# Altium PCB hw_tutorial.PcbDoc
Units mm, origin at the board's own origin, x right, y up, seen from the top; angles counter-clockwise.
Board outline 50 x 50 mm, 2 copper layers (Top Layer, Bottom Layer); 35 components, 24 nets, 146 pads, 47 vias.
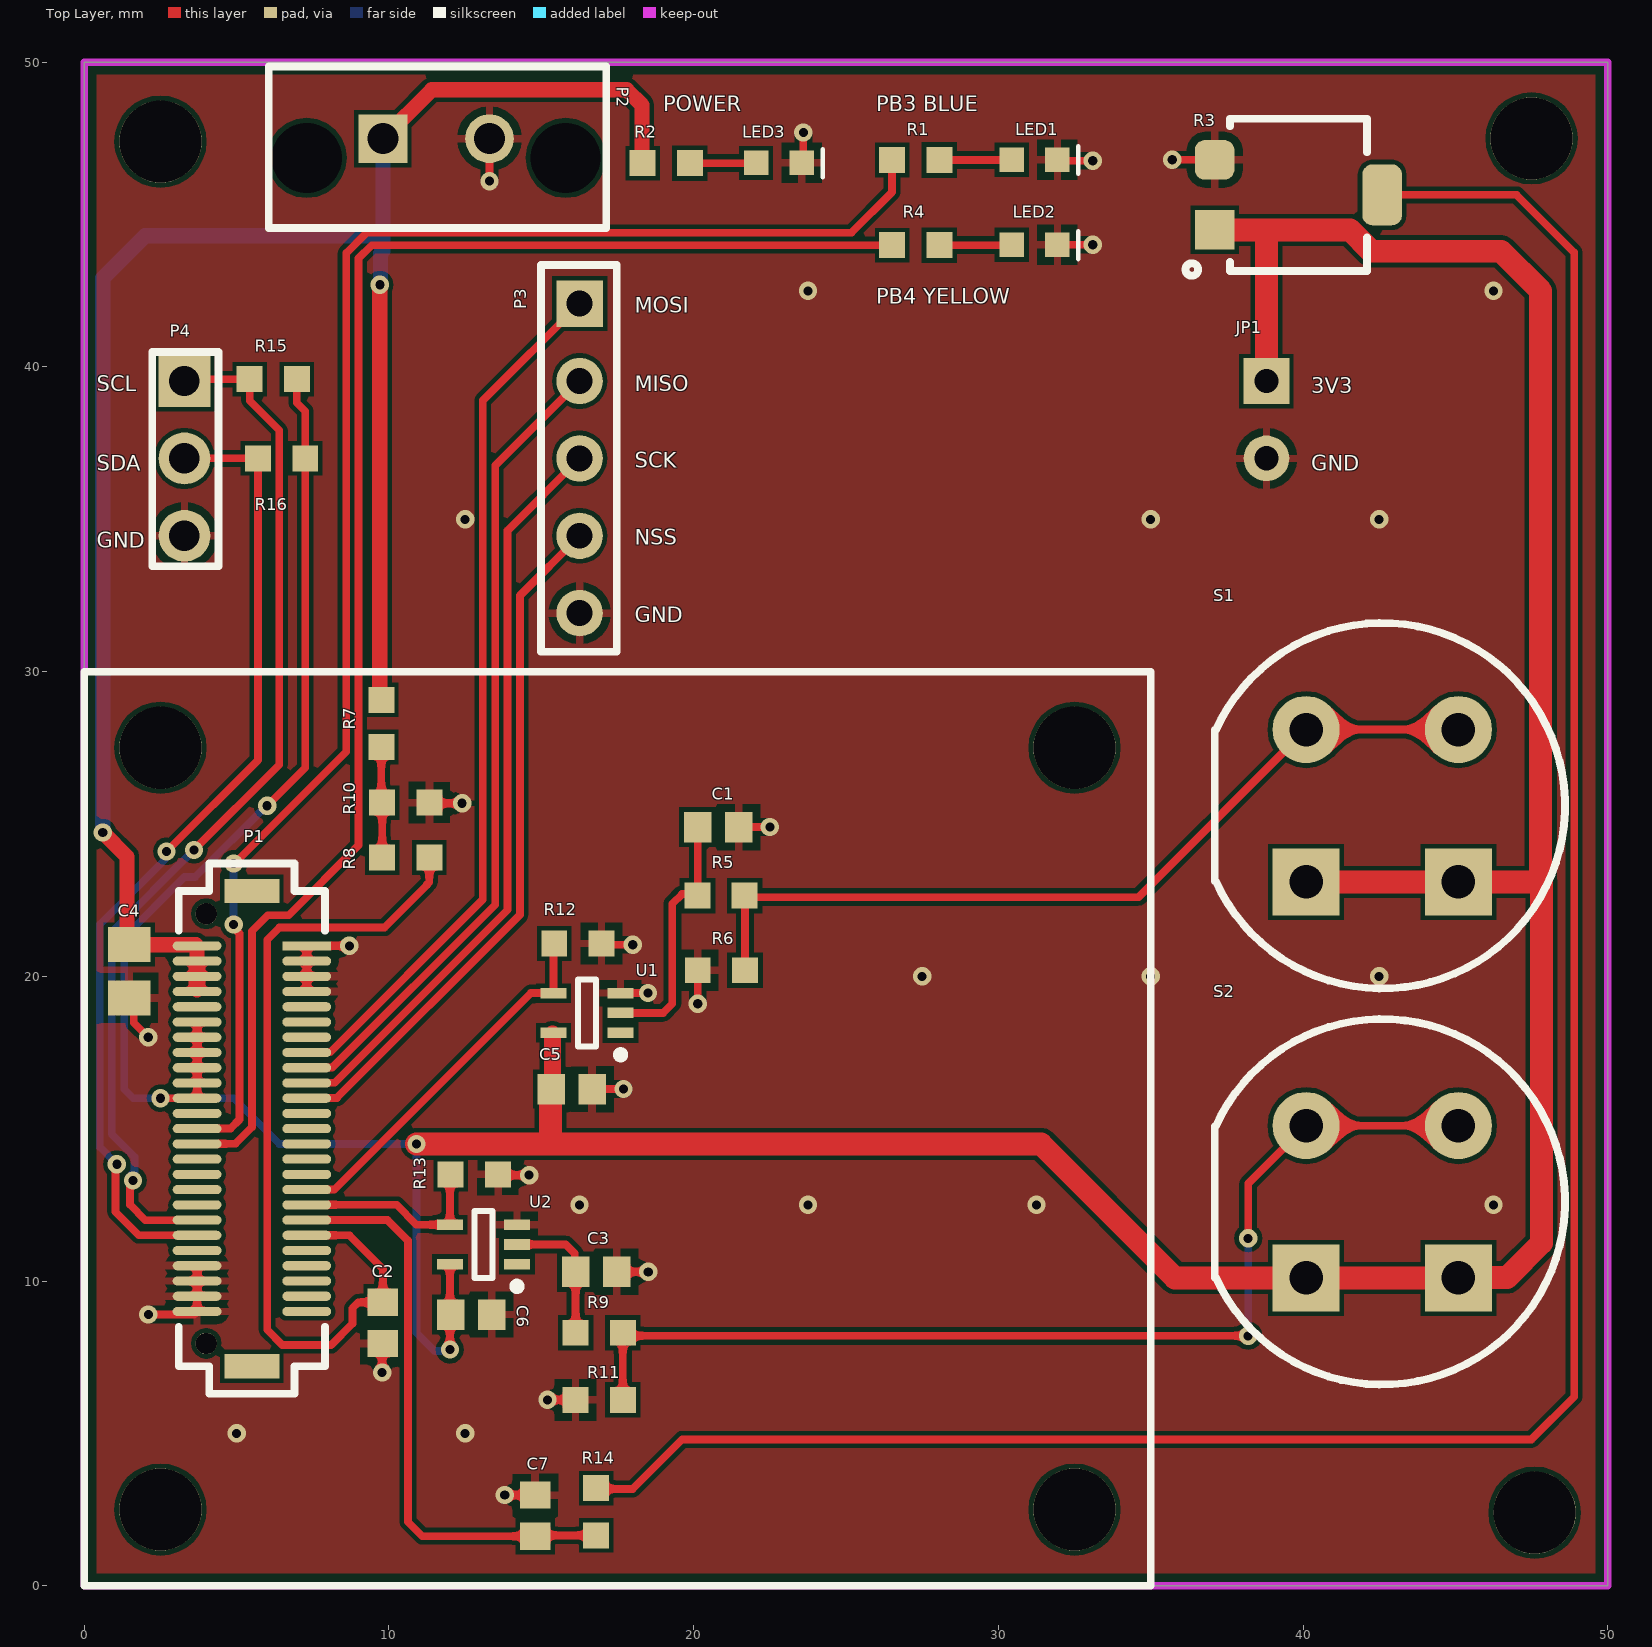
[diagram p0: Top Layer view]
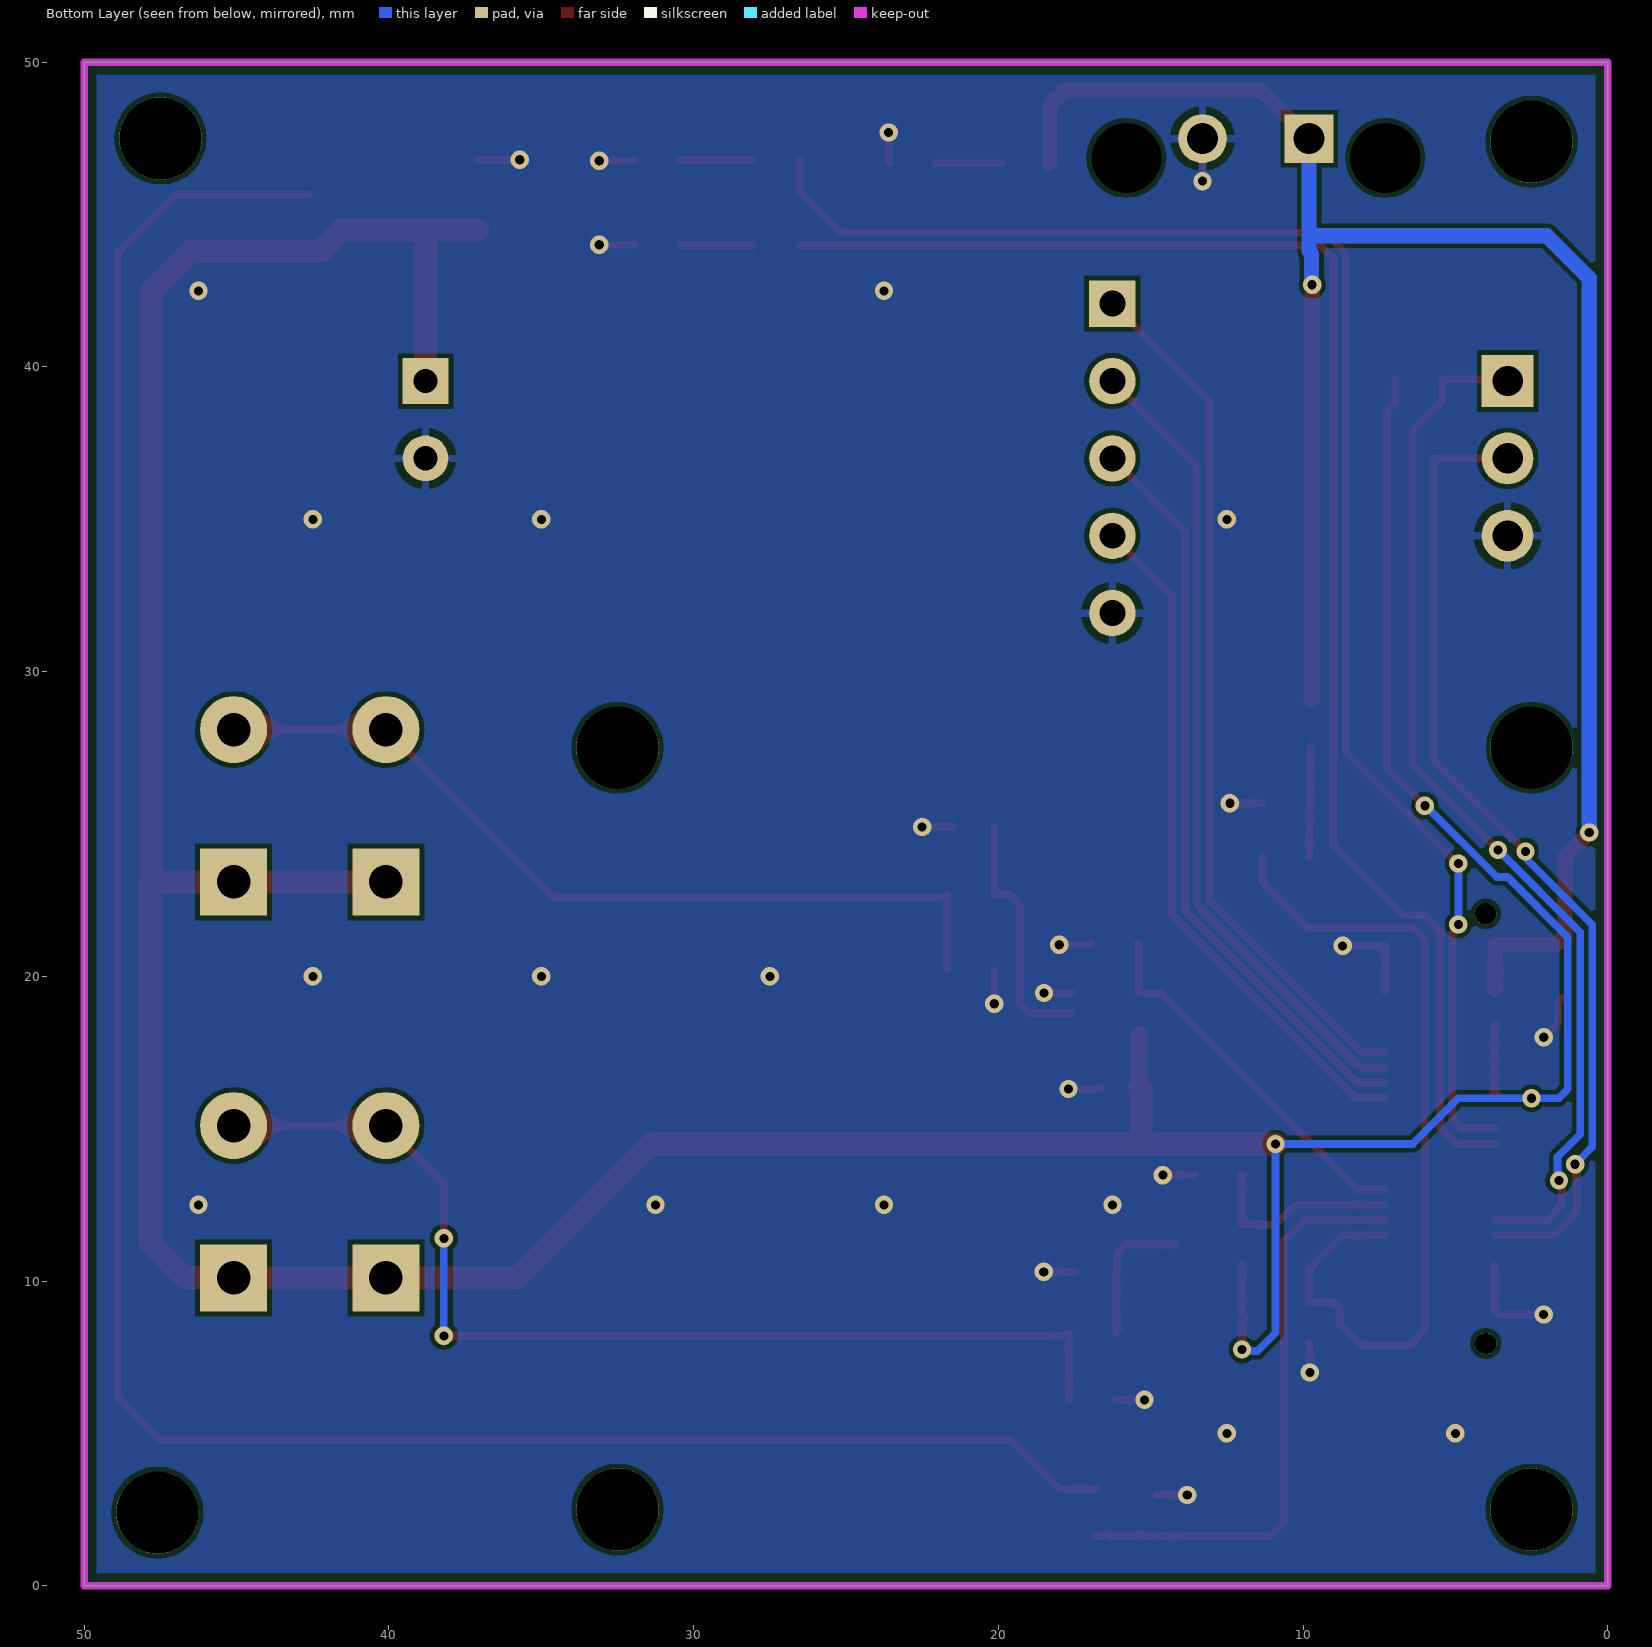
[diagram p1: Bottom Layer view, seen from below]
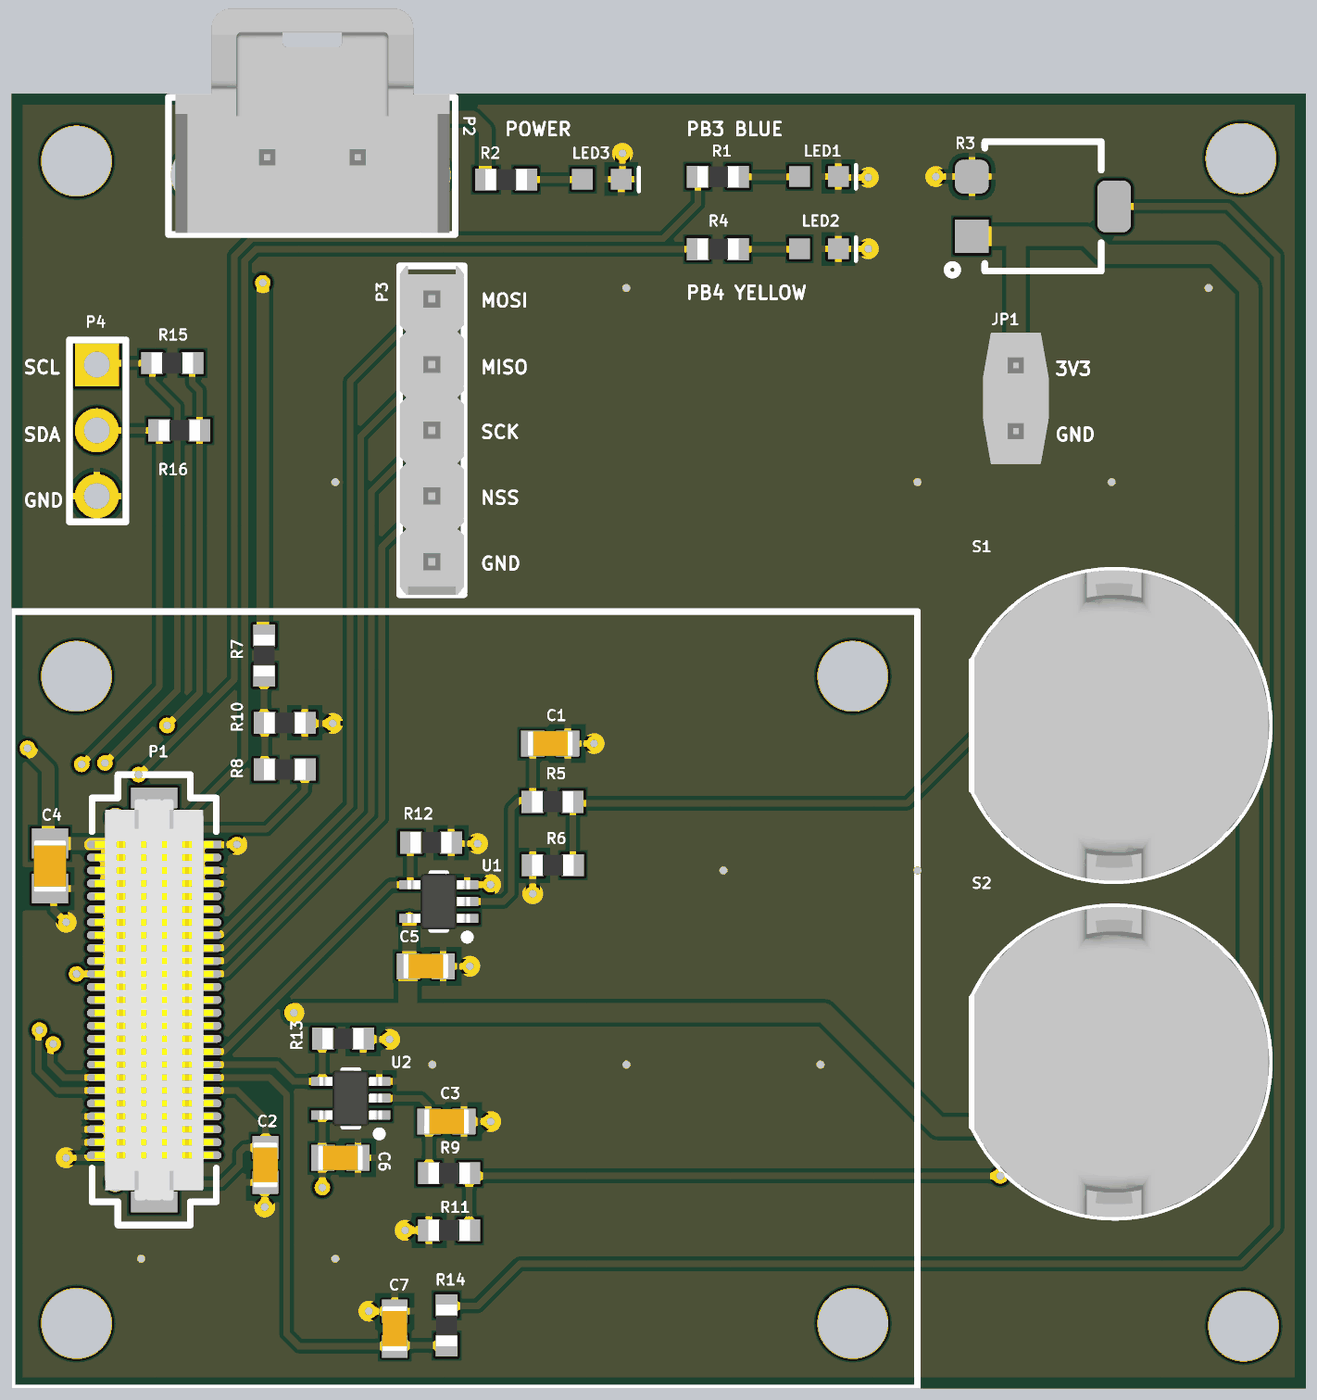
[diagram p2: 3D render of the assembled board from above, using the file's embedded part models]

## Layer stack, top to bottom
Top Solder: solder mask 0.0102, Solder Resist, Dk 3.5
Top Layer: signal copper 0.0356
Dielectric 1: dielectric 0.32, FR-4, Dk 4.8
Bottom Layer: signal copper 0.0356
Bottom Solder: solder mask 0.0102, Solder Resist, Dk 3.5

## Board outline
0,0 0,50 50,50 50,0

## Design rules (kind name [scope] priority, off if disabled: settings)
BoardOutlineClearance [All] p1: gap=0.406 ignorepadtopadclearanceinfootprint=FALSE
Clearance [All] p1: gap=0.152 ignorepadtopadclearanceinfootprint=FALSE except(0: Arc-Hole Track-Hole SMDPad-Hole THPad-Hole Via-Hole Fill-Hole Poly-Hole Region-Hole Text-Hole)
ComponentClearance ComponentClearance_ControllerBoard [InComponent('P1') vs Identifier = 'Controller_Board'] p1: gap=0 collisioncheckmode=3 verticalgap=0 showdistances=FALSE
ComponentClearance ComponentClearance_Standoffs [Identifier = 'Standoff' vs Identifier = 'Controller_Board'] p2: gap=0 collisioncheckmode=3 verticalgap=0 showdistances=FALSE
ComponentClearance [All] p3: gap=0.254 collisioncheckmode=3 verticalgap=0.254 showdistances=FALSE
HoleSize [All] p1: absolutevalues=TRUE maxlimit=6.3 minlimit=0.3 maxpercent=80.000 minpercent=20.000
MinimumAnnularRing [All] p1: minimumring=0.152
MinimumSolderMaskSliver [All] p1: minsoldermaskwidth=0.3
PolygonConnect [IsPad] p1: connectstyle=Relief reliefconductorwidth=0.254 reliefentries=4 polygonreliefangle="90 Angle" airgapwidth=0.254
PolygonConnect PolygonConnect_NoThermal [Not(IsPad)] p2: connectstyle=Direct reliefconductorwidth=0.254 reliefentries=4 polygonreliefangle="90 Angle" airgapwidth=0.254
RoutingVias [All] p1: holewidth=0.3 width=0.6 viastyle="Through Hole" minholewidth=0.3 minwidth=0.6 maxholewidth=0.711 maxwidth=1.27
SilkToSolderMaskClearance [IsPad] p1: minsilkscreentomaskgap=0.178 clearancetoexposedcopper=TRUE
SolderMaskExpansion [All] p1: expansion=0.102
Width [All] p1: maxlimit=2.54 minlimit=0.152 preferedwidth=0.254
26 further rules are at their usual default settings.

## Components (designator, comment, footprint, x,y, rotation, side; value= is the part's Value field where it differs from the comment)
C1 "CAP CER 4.7UF 25V 10% X5R 0603" "CAP, 0603" 20.808,24.9 r0 top
C2 "CAP CER 0.1UF 50V 10% X7R 0603" "CAP, 0603" 9.8,8.625 r270 top
C3 "CAP CER 4.7UF 25V 10% X5R 0603" "CAP, 0603" 16.8,10.3 r0 top
C4 "CAP CER 10uF 25V 10% X5R 0805" "CAP, 0805" 1.476,20.17 r270 top
C5 "CAP CER 0.1UF 50V 10% X7R 0603" "CAP, 0603" 16,16.3 r0 top
C6 "CAP CER 0.1UF 50V 10% X7R 0603" "CAP, 0603" 12.7,8.9 r0 top
C7 "CAP CER 4.7UF 25V 10% X5R 0603" "CAP, 0603" 14.8,2.3 r90 top
JP1 "JUMPER" "CONN, 2POS JUMPER 0.1\"" 38.8,39.54 r270 top
LED1 "LED GREEN CLEAR 2V 0603" LED_0603 30.489,46.795 r0 top
LED2 "LED YELLOW CLEAR 2.1V 0603" LED_0603 30.489,44.002 r0 top
LED3 "LED BLUE CLEAR 2.8V 0603" LED_0603 22.1,46.69 r0 top
P1 "CONN 50POS Bergstak Plug 0.02\"" "CONN, BERGSTAK 50 POS PLUG" 5.5,15 r0 top locked
P2 "CONN 2POS ULTRA-FIT 0.138\"" "CONN, 2POS ULTRA-FIT" 9.8,47.495 r0 top locked
P3 "5POS 0.1" "CONN, 5POS HEADR 0.1\"" 16.258,42.08 r270 top
P4 "CONN 3POS HEADR MALE 0.1\"" "CONN, 3POS 0.100\" Header, 1 ROW" 3.286,39.54 r270 top
R1 "RES 100 OHM 1% 1/10W 0603" "RES, 0603" 27.289,46.795 r0 top
R2 "RES 10K OHM 1% 1/10W 0603" "RES, 0603" 19.1,46.69 r0 top
R3 "POT 20k OHM 20% 1/4W" "20K POT" 42.6,45.65 r180 top value=20K
R4 "RES 100 OHM 1% 1/10W 0603" "RES, 0603" 27.289,44 r0 top
R5 "1K" "RES, 0603" 20.9,22.65 r180 top
R6 "1K" "RES, 0603" 20.908,20.2 r0 top
R7 "RES 10K OHM 1% 1/10W 0603" "RES, 0603" 9.75,28.3 r270 top
R8 "RES 10K OHM 1% 1/10W 0603" "RES, 0603" 10.55,23.9 r0 top
R9 "1K" "RES, 0603" 16.9,8.3 r180 top
R10 "RES 3.3K OHM 1% 1/4W 0603" "RES, 0603" 10.55,25.7 r0 top
R11 "1K" "RES, 0603" 16.9,6.1 r0 top
R12 "1K" "RES, 0603" 16.2,21.075 r180 top
R13 "1K" "RES, 0603" 12.8,13.5 r180 top
R14 "1K" "RES, 0603" 16.8,2.425 r90 top
R15 "RES 10K OHM 1% 1/10W 0603" "RES, 0603" 6.2,39.6 r180 top
R16 "RES 10K OHM 1% 1/10W 0603" "RES, 0603" 6.475,37 r180 top
S1 "SPST" "SW SPST D6 SERIES GREEN" 40.1,23.1 r0 top
S2 "SPST" "SW SPST D6 SERIES YELLOW" 40.1,10.1 r0 top
U1 "IC INVERTER SCHMITT 1CH SC70-5" "IC INVERTER SCHMITT 1CH SC70-5" 16.5,18.8 r180 top
U2 "IC INVERTER SCHMITT 1CH SC70-5" "IC INVERTER SCHMITT 1CH SC70-5" 13.1,11.2 r180 top

## Footprints (in the part's own frame and the unit in brackets; to place one, negate y for a bottom-side part, rotate by r counter-clockwise, add the part's x,y. Pads: shape width x height; smd on the part's side, far side on the other; paste and mask are expansions set on the pad)
"20K POT" [mm]
  rect 1.3x1.3 smd: 1(5.5,1.15)
  rrect50% 1.3x2 smd: 2(0,0)
  rrect50% 1.3x1.3 smd: 3(5.5,-1.15)
  silkscreen extent 0.5,-2.5 6.46,2.66
"CAP, 0603" [mm] "Chip Capacitor, 2-Leads, Body 1.60x0.81mm, IPC Medium Density"
  rect 0.9x1 smd mask+0.076: 1(-0.675,0) 2(0.675,0)
  body extent -0.87,-0.48 0.87,0.48, height 0.9
"CAP, 0805" [mm] "Chip Capacitor, 2-Leads, Body 2.00x1.25mm, IPC Medium Density"
  rect 1.15x1.4 smd: 1(-0.875,0) 2(0.875,0)
  body extent -1,-0.63 1,0.63, height 1.25
"CONN, 2POS JUMPER 0.1\"" [mm]
  rect 1.5x1.5 hole 0.8: 1(0,0)
  round 1.5 hole 0.8: 2(2.54,0)
  body extent -1.24,-1.27 3.84,1.27, height 9.25
"CONN, 2POS ULTRA-FIT" [mm] "2 Positions Header, Shrouded Connector 0.138\" (3.50mm) Through Hole Gold"
  rect 1.6x1.6 hole 1.02: 1(0,0)
  round 1.6 hole 1.02: 2(3.5,0)
  round 1.6 hole 2.3: ""(-2.5,-0.63) ""(6,-0.63)
  silkscreen extent -3.74,-2.93 7.33,2.37, body extent -3.48,-2.87 7.12,5.79, height 13.85
"CONN, 3POS 0.100\" Header, 1 ROW" [mm] "Connector, 3 position 0.1\" (2.54mm) Through Hole Generic Header"
  rect 1.7x1.7 hole 1: 1(0,0)
  round 1.7 hole 1: 2(2.54,0) 3(5.08,0)
  silkscreen extent -0.95,-1.06 6.08,1.12
"CONN, 5POS HEADR 0.1\"" [mil]
  rect 60x60 hole 33.46: 1(0,0)
  round 60 hole 33.46: 2(100,0) 3(200,0) 4(300,0) 5(400,0)
  silkscreen extent -50,-50 450,48, body extent -50,-50 450,48, height 335
"CONN, BERGSTAK 50 POS PLUG" [mm] "Bergstak 50 Position Plug"
  rect 1.6x0.3 smd: 1(1.8,6)
  oval 1.6x0.3 smd: 2(1.8,5.5) 3(1.8,5) 4(1.8,4.5) 5(1.8,4) 6(1.8,3.5) 7(1.8,3) 8(1.8,2.5) 9(1.8,2) 10(1.8,1.5) 11(1.8,1) 12(1.8,0.5) 13(1.8,0) 14(1.8,-0.5) 15(1.8,-1) 16(1.8,-1.5) 17(1.8,-2) 18(1.8,-2.5) 19(1.8,-3) 20(1.8,-3.5) 21(1.8,-4) 22(1.8,-4.5) 23(1.8,-5) 24(1.8,-5.5) 25(1.8,-6) 26(-1.8,-6) 27(-1.8,-5.5) 28(-1.8,-5) 29(-1.8,-4.5) 30(-1.8,-4) 31(-1.8,-3.5) 32(-1.8,-3) 33(-1.8,-2.5) 34(-1.8,-2) 35(-1.8,-1.5) 36(-1.8,-1) 37(-1.8,-0.5) 38(-1.8,0) 39(-1.8,0.5) 40(-1.8,1) 41(-1.8,1.5) 42(-1.8,2) 43(-1.8,2.5) 44(-1.8,3) 45(-1.8,3.5) 46(-1.8,4) 47(-1.8,4.5) 48(-1.8,5) 49(-1.8,5.5) 50(-1.8,6)
  round 0.7 hole 0.7: ""(-1.5,-7.05) ""(-1.5,7.05)
  rect 1.8x0.8 smd: ""(0,-7.8) ""(0,7.8)
  silkscreen extent -2.4,-8.7 2.4,8.7, body extent -2.3,-7.75 2.3,7.75, height 4.2
"IC INVERTER SCHMITT 1CH SC70-5" [mm] "Inverter IC 1 Channel Schmitt Trigger SC-70-5"
  rect 0.85x0.35 smd: 1(-1.1,0.65) 2(-1.1,0) 3(-1.1,-0.65) 4(1.1,-0.65) 5(1.1,0.65)
  silkscreen extent -1.23,-1.1 0.3,1.5, body extent -1.2,-1.07 1.2,1.07, height 1.1
LED_0603 [mm]
  rect 0.8x0.8 smd: 1(-0.05,0.01) 2(1.45,0.01)
  silkscreen extent 2.13,-0.46 2.13,0.45, body extent -0.09,-0.39 1.51,0.41, height 0.8
"RES, 0603" [mm] "Chip Resistor, 2-Leads, Body 1.60x0.80mm, IPC Medium Density"
  rect 0.85x0.85 smd: 1(-0.775,0) 2(0.775,0)
  body extent -0.8,-0.4 0.8,0.4, height 0.55
"SW SPST D6 SERIES GREEN" [mm]
  rect 2.2x2.2 hole 1.1: 1(0,0) 1(5,0)
  round 2.2 hole 1.1: 2(0,5) 2(5,5)
  silkscreen extent -3,-3.5 8.5,8.5, body extent -2.9,-3.5 8.5,8.5, height 6.17
"SW SPST D6 SERIES YELLOW" [mm]
  rect 2.2x2.2 hole 1.1: 1(0,0) 1(5,0)
  round 2.2 hole 1.1: 2(0,5) 2(5,5)
  silkscreen extent -3,-3.5 8.5,8.5, body extent -2.9,-3.5 8.5,8.5, height 6.17

## Part data
C1 C3 C7: "4.7µF ±10% 25V Ceramic Capacitor X5R 0603 (1608 Metric)", Capacitance=4.7µF, Manufacturer 1="Murata Electronics North America", Manufacturer Part Number 1=GRM188R61E475KE11D, Operating Temperature="-55°C ~ 85°C", Package / Case="0603 (1608 Metric)", Ratings=-, Supplier Part Number 1=490-7203-1-ND, Temperature Coefficient=X5R, Tolerance=±10%, Voltage=25V, ComponentLink1Description=http://www.murata.com/~/media/webrenewal/support/library/catalog/products/capacitor/mlcc/c02e.ashx, ComponentLink1URL=http://www.murata.com/~/media/webrenewal/support/library/catalog/products/capacitor/mlcc/c02e.ashx, Height - Seated (Max)=-, Lead Spacing=-, Lead Style=-, Mounting Type="Surface Mount, MLCC", Packaging="Cut Tape (CT)", Part Status=Active, Size / Dimension="0.063\" L x 0.031\" W (1.60mm x 0.80mm)", Supplier 1=Digi-Key, Thickness (Max)="0.031\" (0.80mm)"
C2 C5 C6: "0.10µF ±10% 50V Ceramic Capacitor X7R 0603 (1608 Metric)", Capacitance=0.1µF, Manufacturer 1="AVX Corporation", Manufacturer Part Number 1=06035C104KAT2A, Operating Temperature="-55°C ~ 125°C", Package / Case="0603 (1608 Metric)", Ratings=-, Supplier Part Number 1=478-5052-1-ND, Temperature Coefficient=X7R, Tolerance=±10%, Voltage=50V, ComponentLink1Description=http://datasheets.avx.com/X7RDielectric.pdf, ComponentLink1URL=http://datasheets.avx.com/X7RDielectric.pdf, Height - Seated (Max)=-, Lead Spacing=-, Lead Style=-, Mounting Type="Surface Mount, MLCC", Packaging="Cut Tape (CT)", Part Status=Active, Size / Dimension="0.063\" L x 0.032\" W (1.60mm x 0.81mm)", Supplier 1=Digi-Key, Thickness (Max)="0.035\" (0.90mm)"
C4: "10µF ±10% 25V Ceramic Capacitor X5R 0805 (2012 Metric)", Capacitance=10µF, Manufacturer="Murata Electronics North America", Manufacturer Part Number=GRM21BR61E106KA73L, Operating Temperature="-55°C ~ 85°C", Package / Case="0805 (2012 Metric)", Ratings=-, Supplier Part Number 1=490-5523-1-ND, Temperature Coefficient=X5R, Tolerance=±10%, Voltage - Rated=25V, Applications="General Purpose", Category=Capacitors, ComponentLink1Description=http://search.murata.co.jp/Ceramy/image/img/A01X/G101/ENG/GRM21BR61E106KA73-01.pdf, ComponentLink1URL=http://search.murata.co.jp/Ceramy/image/img/A01X/G101/ENG/GRM21BR61E106KA73-01.pdf, Features=-, Height - Seated (Max)=-, Lead Spacing=-, Lead Style=-, Mounting Type="Surface Mount, MLCC", Packaging="Cut Tape (CT)", Part Status=Active, Pricing 1="1=0.3, 10=0.214, 100=0.1008, 500=0.07068, 1000=0.05851 (CAD)", RoHS="RoHS Compliant", Size / Dimension="0.079\" L x 0.049\" W (2.00mm x 1.25mm)", Stock 1=1695157, Supplier 1=Digi-Key, Thickness (Max)="0.053\" (1.35mm)"
JP1: library part "CONN 2POS JUMPER 0.1\"", "2 Positions Header Connector Through Hole Gold", Current Rating=2A, Insulation Color=Black, Manufacturer="Omron Electronics Inc-EMC Div", Manufacturer Part Number=XG8T-0231, Material Flammability Rating="UL94 V-0", Operating Temperature="-55°C ~ 105°C", Supplier Part Number 1=XG8T-0231-ND, Voltage Rating=300V, Applications=-, Category="Connectors, Interconnects", ComponentLink1Description=http://www.omron.com/ecb/products/pdf/en-xj8.pdf, ComponentLink1URL=http://www.omron.com/ecb/products/pdf/en-xj8.pdf, Connector Type=Header, Contact Finish - Mating=Gold, Contact Finish - Post=Tin, Contact Finish Thickness - Mating="5.9µin (0.15µm)", Contact Finish Thickness - Post=-, Contact Length - Mating="0.169\" (4.30mm)", Contact Length - Post="0.118\" (3.00mm)", Contact Material="Brass, Nickel", Contact Shape=Square, Contact Type="Male Pin", Fastening Type=-, Features=-, Ingress Protection=-, Insulation Height="0.098\" (2.50mm)", Insulation Material="Polybutylene Terephthalate (PBT), Glass Filled", Mated Stacking Heights=-, Mounting Type="Through Hole", Number of Positions=2, Number of Positions Loaded=All, Number of Rows=2, Overall Contact Length="0.386\" (9.80mm)", Packaging=Bulk, Part Status=Active, Pitch - Mating=-, Pricing 1="1=0.28, 10=0.265, 100=0.183, 500=0.15484, 1000=0.12668, 5000=0.11261, 10000=0.10205 (CAD)", RoHS="RoHS Compliant", Row Spacing - Mating="0.100\"", Shrouding=Unshrouded, Stock 1=9094, Style="Board to Board or Cable", Supplier 1=Digi-Key, Termination=Solder, Type=JUMPER
LED1: "Green 572nm LED Indication - Discrete 2V 0603 (1608 Metric)", Color=Green, Current - Test=20mA, Lens Color=Colorless, Manufacturer="Wurth Electronics Inc.", Manufacturer Part Number=150060VS75000, Millicandela Rating=40mcd, Package / Case="0603 (1608 Metric)", Supplier Device Package=0603, Supplier Part Number 1=732-4980-1-ND, Voltage - Forward (Vf) (Typ)=2V, Category=Optoelectronics, ComponentLink1Description=http://katalog.we-online.de/led/datasheet/150060VS75000.pdf, ComponentLink1URL=http://katalog.we-online.de/led/datasheet/150060VS75000.pdf, Features=-, Height (Max)=0.80mm, Lens Style/Size="Rectangle with Flat Top, 1.10mm x 0.70mm", Lens Transparency=Clear, Mounting Type="Surface Mount", Packaging="Cut Tape (CT)", Part Status=Active, Pricing 1="1=0.21, 100=0.1617, 500=0.13964 (CAD)", RoHS="RoHS Compliant", Size / Dimension="1.60mm L x 0.80mm W", Stock 1=9408, Supplier 1=Digi-Key, Viewing Angle=140°, Wavelength - Dominant=570nm, Wavelength - Peak=572nm
LED2: "Yellow 590nm LED Indication - Discrete 2V 0603 (1608 Metric)", Color=Yellow, Current - Test=20mA, Lens Color=Colorless, Manufacturer="Wurth Electronics Inc.", Manufacturer Part Number=150060YS75000, Millicandela Rating=120mcd, Package / Case="0603 (1608 Metric)", Supplier Device Package=0603, Supplier Part Number 1=732-4981-1-ND, Voltage - Forward (Vf) (Typ)=2V, Category=Optoelectronics, ComponentLink1Description=http://katalog.we-online.de/led/datasheet/150060YS75000.pdf, ComponentLink1URL=http://katalog.we-online.de/led/datasheet/150060YS75000.pdf, Features=-, Height (Max)=0.80mm, Lens Style/Size="Rectangle with Flat Top, 1.10mm x 0.70mm", Lens Transparency=Clear, Mounting Type="Surface Mount", Packaging="Cut Tape (CT)", Part Status=Active, Pricing 1="1=0.21, 100=0.1617, 500=0.13964 (CAD)", RoHS="RoHS Compliant", Size / Dimension="1.60mm L x 0.80mm W", Stock 1=10523, Supplier 1=Digi-Key, Viewing Angle=140°, Wavelength - Dominant=590nm, Wavelength - Peak=595nm
LED3: "Blue 470nm LED Indication - Discrete 2.8V 0603 (1608 Metric)", Color=Blue, Current - Test=5mA, Lens Color=Colorless, Manufacturer 1="Lite-On Inc.", Manufacturer Part Number 1=LTST-C193TBKT-5A, Millicandela Rating=15mcd, Package / Case="0603 (1608 Metric)", Supplier Device Package="Chip LED", Supplier Part Number 1=160-1827-1-ND, Voltage - Forward (Vf) (Typ)=2.8V, ComponentLink1Description=http://optoelectronics.liteon.com/upload/download/DS22-2004-060/P_100_LTST-C193TBKT-5A.pdf, ComponentLink1URL=http://optoelectronics.liteon.com/upload/download/DS22-2004-060/P_100_LTST-C193TBKT-5A.pdf, Height (Max)=0.45mm, Lens Style/Size="Rectangle with Flat Top, 1.15mm x 0.80mm", Lens Transparency=Clear, Mounting Type="Surface Mount", Packaging="Cut Tape (CT)", Part Status=Active, Size / Dimension="1.60mm L x 0.80mm W", Supplier 1=Digi-Key, Viewing Angle=130°, Wavelength - Dominant=470nm, Wavelength - Peak=468nm
P1: "50 Position Connector Plug, Outer Shroud Contacts Surface Mount Gold", Manufacturer 1="Amphenol FCI", Manufacturer Part Number 1=10132797-055100LF, Supplier Part Number 1=609-5226-1-ND, ComponentLink1Description=http://portal.fciconnect.com/Comergent//fci/drawing/10132797.pdf, ComponentLink1URL=http://portal.fciconnect.com/Comergent//fci/drawing/10132797.pdf, Connector Type="Plug, Outer Shroud Contacts", Contact Finish=Gold, Contact Finish Thickness="1µin (0.025µm)", Height Above Board="0.169\" (4.30mm)", Mated Stacking Heights=5mm, Mounting Type="Surface Mount", Number of Positions=50, Number of Rows=2, Packaging="Cut Tape (CT)", Part Status=Active, Pitch="0.020\" (0.50mm)", Series="BergStak Plug", Supplier 1=Digi-Key
P2: "2 Positions Header, Shrouded Connector 0.138\" (3.50mm) Through Hole Gold", Current Rating=-, Insulation Color=Black, Manufacturer 1="Molex, LLC", Manufacturer Part Number 1=1722861302, Material Flammability Rating="UL94 V-0", Operating Temperature="-40°C ~ 120°C", Supplier Part Number 1=WM11673-ND, Voltage=400V, ComponentLink1Description=http://www.molex.com/pdm_docs/sd/1722861302_sd.pdf, ComponentLink1URL=http://www.molex.com/pdm_docs/sd/1722861302_sd.pdf, Connector Type=Header, Contact Finish - Mating=Gold, Contact Finish - Post=Tin, Contact Finish Thickness - Mating="30µin (0.76µm)", Contact Finish Thickness - Post="60µin (1.52µm)", Contact Length - Mating=-, Contact Length - Post="0.126\" (3.20mm)", Contact Material="Copper Alloy", Contact Shape=Square, Contact Type="Male Pin", Fastening Type="Latch Holder", Ingress Protection=-, Insulation Height="0.465\" (11.80mm)", Insulation Material="Liquid Crystal Polymer (LCP)", Mated Stacking Heights=26.99mm, Mounting Type="Through Hole", Number of Positions=2, Number of Positions Loaded=All, Number of Rows=1, Overall Contact Length=-, Packaging=Tray, Part Status=Active, Pitch - Mating="0.138\" (3.50mm)", Row Spacing - Mating=-, Series=UltraFit, Shrouding="Shrouded - 4 Wall", Style="Board to Board or Cable", Supplier 1=Digi-Key, Termination="Kinked Pin, Solder"
P3: library part "CONN 5POS HEADR MALE 0.1in", "5 Positions Header, Breakaway Connector 0.100\" (2.54mm) Through Hole Tin", Colour=Black, Contact Resistance=20mR, Manufacturer 1=Molex, Manufacturer Part Number 1=0022284050, Max Operating Temperature=75°C, Max Voltage Rating (AC)=250V, Min Operating Temperature=0°C, Supplier Part Number 1=WM50014-05-ND, ComponentLink1Description=https://datasheet.ciiva.com/6814/022284363-sd-6814049.pdf, ComponentLink1URL=https://datasheet.ciiva.com/6814/022284363-sd-6814049.pdf, ComponentLink2Description=https://datasheet.ciiva.com/14804/179390022284050-pcb-headers-14804361.pdf, ComponentLink2URL=https://datasheet.ciiva.com/14804/179390022284050-pcb-headers-14804361.pdf, ComponentLink3Description=https://datasheet.ciiva.com/15217/getdatasheetpartid-256138-15217709.pdf, ComponentLink3URL=https://datasheet.ciiva.com/15217/getdatasheetpartid-256138-15217709.pdf, Connector Type="Male Pin", Contact Material=Bronze,Brass, Contact Mating Length=0.24inch, Contact Plating=Nickel,Tin, Depth=2.49mm, Description 1="Conn Unshrouded Header HDR 5 POS 2.54mm Solder ST Thru-Hole KK® Bag", Gender=Male, Housing Colour=Black, Housing Material=Nylon, Length=12.7mm, Max Voltage Rating (DC)=250V, Mount="Through Hole", Number of Contacts=5, Number of Positions=5, Number of Rows=1, Orientation=Straight, Packaging=Bulk, Pitch=2.54mm, Pricing 1="1=0.22, 10=0.21, 25=0.1796, 50=0.157, 100=0.1459, 250=0.129, 500=0.1234 (USD)", Stock 1=3161, Supplier 1=Digi-Key, Termination=Solder
P4: "3 Positions Header Connector 0.100\" (2.54mm) Through Hole Gold", Current Rating=3A, Insulation Color=Black, Manufacturer 1="Wurth Electronics Inc.", Manufacturer Part Number 1=61300311121, Material Flammability Rating="UL94 V-0", Operating Temperature="-40°C ~ 125°C", Supplier Part Number 1=732-5316-ND, Voltage=250V, ComponentLink1Description=http://katalog.we-online.de/em/datasheet/6130xx11121.pdf, ComponentLink1URL=http://katalog.we-online.de/em/datasheet/6130xx11121.pdf, Connector Type=Header, Contact Finish - Mating=Gold, Contact Finish - Post=-, Contact Finish Thickness - Mating=-, Contact Finish Thickness - Post=-, Contact Length - Mating="0.236\" (6.00mm)", Contact Length - Post="0.118\" (3.00mm)", Contact Material="Copper Alloy", Contact Shape=Square, Contact Type="Male Pin", Fastening Type=-, Ingress Protection=-, Insulation Height="0.100\" (2.54mm)", Insulation Material="Polybutylene Terephthalate (PBT)", Mated Stacking Heights=-, Mounting Type="Through Hole", Number of Positions=3, Number of Positions Loaded=All, Number of Rows=1, Overall Contact Length="0.454\" (11.54mm)", Packaging=Bulk, Part Status=Active, Pitch - Mating="0.100\" (2.54mm)", Row Spacing - Mating=-, Shrouding=Unshrouded, Style="Board to Board or Cable", Supplier 1=Digi-Key, Termination=Solder
R1 R4: "100 Ohm ±1% 0.1W, 1/10W Chip Resistor 0603 (1608 Metric) Moisture Resistant Thick Film", Manufacturer 1=Yageo, Manufacturer Part Number 1=RC0603FR-07100RL, Operating Temperature="-55°C ~ 155°C", Package / Case="0603 (1608 Metric)", Power=1/10W, Resistance=100, Supplier Device Package=0603, Supplier Part Number 1=311-100HRCT-ND, Temperature Coefficient=±100ppm/°C, Tolerance=±1%, ComponentLink1Description=http://www.yageo.com/documents/recent/PYu-RC_Group_51_RoHS_L_7.pdf, ComponentLink1URL=http://www.yageo.com/documents/recent/PYu-RC_Group_51_RoHS_L_7.pdf, Composition="Thick Film", Failure Rate=-, Height - Seated (Max)="0.022\" (0.55mm)", Packaging="Cut Tape (CT)", Part Status=Active, Size / Dimension="0.063\" L x 0.031\" W (1.60mm x 0.80mm)", Supplier 1=Digi-Key
R2 R7 R8 R15 R16: "RES SMD 10K OHM 1% 1/10W 0603", Manufacturer 1=Yageo, Manufacturer Part Number 1=RC0603FR-0710KL, Operating Temperature="-55°C ~ 155°C", Package / Case="0603 (1608 Metric)", Power=1/10W, Resistance=10k, Supplier Device Package=0603, Supplier Part Number 1=311-10.0KHRCT-ND, Temperature Coefficient=±100ppm/°C, Tolerance=±1%, ComponentLink1Description=http://www.yageo.com/documents/recent/PYu-RC_Group_51_RoHS_L_7.pdf, ComponentLink1URL=http://www.yageo.com/documents/recent/PYu-RC_Group_51_RoHS_L_7.pdf, Composition="Thick Film", Failure Rate=-, Height - Seated (Max)="0.022\" (0.55mm)", Packaging="Cut Tape (CT)", Part Status=Active, Size / Dimension="0.063\" L x 0.031\" W (1.60mm x 0.80mm)", Supplier 1=Digi-Key
R3: "20k Ohm 0.25W, 1/4W Gull Wing Surface Mount Trimmer Potentiometer", Manufacture="TT Electronics/BI", Manufacture Part Number=23BR20KLFTR, Power=1/4W, Supplier Part Number 1=987-1016-1-ND, Tolerence=20%, Adjustment Type=Top, Supplier 1=Digi-Key, Turns=1
R5 R6 R9 R11 R12 R13 R14: library part "RES 1K OHM 5% 1/10W 0603", "1k Ohm ±5% 0.1W, 1/10W Chip Resistor 0603 (1608 Metric)", Manufacturer=Yageo, Manufacturer Part Number=RC0603JR-071KL, Operating Temperature="-55°C ~ 155°C", Package / Case="0603 (1608 Metric)", Power (Watts)="0.1W, 1/10W", Resistance (Ohms)=1k, Supplier Device Package=0603, Supplier Part Number 1=311-1.0KGRCT-ND, Temperature Coefficient=±100ppm/°C, Tolerance=±5%, Category=Resistors, ComponentLink1Description=http://www.yageo.com/documents/recent/PYu-RC_Group_51_RoHS_L_7.pdf, ComponentLink1URL=http://www.yageo.com/documents/recent/PYu-RC_Group_51_RoHS_L_7.pdf, Composition="Thick Film", Failure Rate=-, Features="Moisture Resistant", Height - Seated (Max)="0.022\" (0.55mm)", Packaging="Cut Tape (CT)", Part Status=Active, Pricing 1="1=0.15, 10=0.017, 100=0.0071, 1000=0.0032, 2500=0.00278 (CAD)", RoHS="RoHS Compliant", Size / Dimension="0.063\" L x 0.031\" W (1.60mm x 0.80mm)", Stock 1=4415240, Supplier 1=Digi-Key
R10: "3.3k Ohm ±1% 0.25W, 1/4W Chip Resistor 0603 (1608 Metric) Automotive AEC-Q200, Pulse Withstanding Thick Film", Manufacturer 1="Panasonic Electronic Components", Manufacturer Part Number 1=ERJ-PA3F3301V, Operating Temperature="-55°C ~ 155°C", Package / Case="0603 (1608 Metric)", Power=1/4W, Resistance=3.3k, Supplier Device Package=0603, Supplier Part Number 1=P3.3KBYCT-ND, Temperature Coefficient=±100ppm/°C, Tolerance=±1%, ComponentLink1Description=https://industrial.panasonic.com/cdbs/www-data/pdf/RDO0000/AOA0000C291.pdf, ComponentLink1URL=https://industrial.panasonic.com/cdbs/www-data/pdf/RDO0000/AOA0000C291.pdf, Composition="Thick Film", Failure Rate=-, Height - Seated (Max)="0.022\" (0.55mm)", Packaging="Cut Tape (CT)", Part Status=Active, Size / Dimension="0.063\" L x 0.031\" W (1.60mm x 0.80mm)", Supplier 1=Digi-Key
S1: library part "SW SPST-NO 0.1A 32V D6 Series Green", "Pushbutton Switch SPST-NO Keyswitch Through Hole D6 Series Green", Color - Actuator/Cap=Green, Current Rating="100mA (DC)", Illumination Type, Color=-, Manufacturer=C&K, Manufacturer Part Number="D6R50 F1 LFS", Operating Temperature="-20°C ~ 85°C", Supplier Part Number 1=401-1976-ND, Voltage Rating - DC=32V, Actuator Type="Round, Button", Category=Switches, Circuit=SPST-NO, ComponentLink1Description=http://www.ckswitches.com/media/1341/d6.pdf, ComponentLink1URL=http://www.ckswitches.com/media/1341/d6.pdf, Electrical Life="250,000 Cycles", Features="Tactile Feedback", Illumination Voltage (Nominal)=-, Ingress Protection=-, Mechanical Life=-, Mounting Type="Through Hole", Packaging=Bulk, Panel Cutout Dimensions=-, Part Status=Active, Pricing 1="1=1.73, 10=1.607, 25=1.5308, 50=1.454, 100=1.4158, 250=1.37756, 500=1.30102, 1000=1.22448, 5000=1.03316 (CAD)", RoHS="RoHS Compliant", Stock 1=3742, Supplier 1=Digi-Key, Switch Function=Off-Mom, Termination Style="PC Pin", Type=Keyswitch, Voltage Rating - AC=-
S2: library part "SW SPST-NO 0.1A 32V D6 Series Yellow", "Pushbutton Switch SPST-NO Keyswitch Through Hole D6 Series Yellow", Color - Actuator/Cap=Yellow, Current Rating="100mA (DC)", Illumination Type, Color=-, Manufacturer=C&K, Manufacturer Part Number="D6R30 F1 LFS", Operating Temperature="-20°C ~ 85°C", Supplier Part Number 1=401-1974-ND, Voltage Rating - DC=32V, Actuator Type="Round, Button", Category=Switches, Circuit=SPST-NO, ComponentLink1Description=http://www.ckswitches.com/media/1341/d6.pdf, ComponentLink1URL=http://www.ckswitches.com/media/1341/d6.pdf, Electrical Life="250,000 Cycles", Features="Tactile Feedback", Illumination Voltage (Nominal)=-, Ingress Protection=-, Mechanical Life=-, Mounting Type="Through Hole", Packaging=Bulk, Panel Cutout Dimensions=-, Part Status=Active, Pricing 1="1=1.73, 10=1.607, 25=1.5308, 50=1.454, 100=1.4158, 250=1.37756, 500=1.30102, 1000=1.22448, 5000=1.03316 (CAD)", RoHS="RoHS Compliant", Stock 1=2814, Supplier 1=Digi-Key, Switch Function=Off-Mom, Termination Style="PC Pin", Type=Keyswitch, Voltage Rating - AC=-
U1 U2: "Inverter IC 1 Channel Schmitt Trigger SC-70-5", Case/Package=TSSOP, High Level Output Current=5.2mA, Manufacturer=STMicroelectronics, Manufacturer Part Number=M74HC14YTTR, Max Operating Temperature=125°C, Max Supply Voltage=6V, Min Operating Temperature=-40°C, Min Supply Voltage=2V, Package Quantity=2500, Quiescent Current=1uA, Supplier Part Number 1=296-47215-1-ND, Lead Free="Lead Free", Logic Function=Inverter, Low Level Output Current=5.2mA, Mount="Surface Mount", Number of Bits=1, Number of Circuits=6, Number of Inputs=6, Number of Pins=14, Packaging="Tape and Reel", Pricing 1="1 = 0.36000, 10 = 0.29000, 100 = 0.19780, 500 = 0.14832, 1000 = 0.11124 (USD)", Propagation Delay=21ns, RoHS=Yes, Stock 1=11031, Supplier 1=Digi-Key, Turn-On Delay Time=25ns, Weight=0.004949oz

## Free pads (board coordinates)
  round 2.7 hole 2.7: ""(2.5,2.5) ""(2.5,27.5) ""(2.5,47.4) ""(32.5,2.5) ""(32.5,27.5) ""(47.5,47.5) ""(47.6,2.4)

## Via types
v1: diameter 0.6, hole 0.3, Top Layer to Bottom Layer, 33 vias
v2: diameter 0.6, hole 0.3, Top Layer to Bottom Layer, tented both sides, 14 vias

## Nets (pads, with @x,y where several pads share a name; then routed paths per layer and width w, separated by ;. In a path a pad name is that pad's centre, name@x,y a point inside that pad or via, vN(x,y) a via of type N, cw(c..) or ccw(c..) an arc to the next point about the centre after c; other vN are vias at no path point)
3V3: C5.1 C6.1 JP1.1 P1.40 P1.41 P1.42 P1.43 P1.44 P1.45 R3.1 R15.1 R16.1 S1.1 S2.1 U1.5 U2.5 | length 148.7
  Top Layer w0.254: v1(2.5,16) P1.40 P1.41 P1.42 P1.43 P1.44 P1.45@3.7,18.448 ; v1(6,25.6) 7.25,26.85 R16.1 7.25,38.55 6.975,38.825 R15.1 ; v1(12,7.75) 12,8.675 11.9,8.775 C6.1 ; C6.1@12,8.975 U2.5
  Top Layer w0.55: C5.1@15.363,16.338 U1.5@15.363,18.113
  Top Layer w0.75: v1(10.9,14.5) 15.3,14.5 ; C5.1@15.363,16.338 C5.1 15.3,16.275 15.3,14.5 ; R3.1 38.8,44.5 JP1.1 ; 38.9,44.5 41.545,44.5 42.245,43.8 46.5,43.8 47.8,42.5 47.8,23.1 45.1,23.1 S1.1@40.1,23.1 ; 47.83,23.1 47.83,11.247 46.7,10.117 45.117,10.117 45.1,10.1 40.1,10.1 35.8,10.1 31.4,14.5 15.3,14.5
  Bottom Layer w0.254: v1(6,25.6) 5.981,25.6 3.645,23.264 3.286,23.264 1.307,21.285 1.307,16.3 1.607,16 v1(2.5,16) 4.9,16 6.4,14.5 v1(10.9,14.5) 10.9,8.3 11.5,7.7 11.95,7.7 v1(12,7.75)
+12V: C4.1 P1.47 P1.48 P1.49 P1.50 P2.1 R2.1 R7.1 | length 65.2
  Top Layer w0.5: v1(0.606,24.719) 1.4,23.926 1.4,21.337 1.7,21.037 3.662,21.037 P1.50 P1.49 P1.48 P1.47@3.7,19.552 ; v1(9.7,42.7) 9.7,29.125 R7.1 ; P2.1 11.405,49.1 17.8,49.1 18.3,48.6 18.3,46.715 R2.1
  Bottom Layer w0.5: v1(0.606,24.719) 0.606,42.918 1.993,44.305 9.6,44.305 9.8,44.505 P2.1 ; v1(9.7,42.7) 9.719,42.719 9.719,43.724 9.8,43.805 9.8,44.305
BTN1: C1.1 R5.2 U1.2 | length 8.3
  Top Layer w0.254: U1.2 19,18.8 19.3,19.1 19.3,22.381 19.619,22.7 R5.2@20.125,22.7 ; R5.2 20.133,22.658 C1.1
BTN2: C3.1 R9.2 U2.2 | length 4.8
  Top Layer w0.254: U2.2 15.8,11.2 15.95,11.05 ; 15.951,11.05 16.1,10.901 16.1,10.325 C3.1 R9.2 R9.2@16.025,8.4
GND: C1.2 C2.2 C3.2 C4.2 C5.2 C6.2 C7.2 JP1.2 LED1.2 LED2.2 LED3.2 P1.1 P1.2 P1.3 P1.4 P1.26 P1.27 P1.28 P1.29 P2.2 P3.5 P4.3 R3.3 R6.1 R10.2 R11.1 R12.1 R13.1 U1.3 U2.3 | length 25
  Top Layer w0.254: C4.2 1.618,19.153 1.618,18.482 v1(2.1,18) ; v1(2.101,8.9) 3.6,8.9 P1.26 P1.27 P1.28 P1.29 ; P1.4 P1.3 P1.2 P1.1 v1(8.7,21) ; v1(9.775,7) 9.775,7.925 C2.2 ; R10.2 11.345,25.68 v1(12.4,25.68) ; v1(13.3,46.1) P2.2 ; R13.1 13.6,13.475 v1(14.6,13.475) ; v1(13.8,2.975) 14.75,2.975 14.775,3 C7.2 ; v1(15.2,6.1) R11.1 ; C5.2@16.625,16.35 C5.2 v1(17.7,16.3) ; R12.1 17.013,21.037 v1(18,21.037) ; C3.2 v1(18.508,10.3) ; U1.3 v1(18.5,19.45) ; v1(20.133,19.1) 20.133,20.17 20.118,20.185 R6.1 ; C1.2 v1(22.5,24.9) ; LED3.2 23.6,46.75 v1(23.6,47.7) ; LED2.2 v1(33.1,44.012) ; LED1.2 31.974,46.77 v1(33.1,46.77) ; v1(35.708,46.802) 37.098,46.802 R3.3
  other v2: 5,5 12.5,5 16.25,12.5 23.75,12.5 31.25,12.5 46.25,12.5 27.5,20 35,20 42.5,20 12.5,35 35,35 42.5,35 23.75,42.5 46.25,42.5
NetLED1_1: LED1.1 R1.2 | length 2.4
  Top Layer w0.254: R1.2 30.429,46.795 LED1.1
NetLED2_1: LED2.1 R4.2 | length 2.4
  Top Layer w0.254: R4.2 30.427,44 LED2.1
NetLED3_1: LED3.1 R2.2 | length 2.2
  Top Layer w0.254: R2.2 22.04,46.69 LED3.1
NetR3_2: R3.2 R14.2 | length 78
  Top Layer w0.254: R14.2 16.825,3.175 18,3.175 19.625,4.8 47.5,4.8 48.9,6.2 48.9,43.755 47.005,45.65 R3.2
NetR5_1: R5.1 R6.2 S1.2 | length 28.1
  Top Layer w0.254: R5.1@21.675,22.7 21.775,22.6 34.6,22.6 40.1,28.1 S1.2@45.1,28.1 ; R6.2 R5.1@21.683,22.6
NetR7_2: R7.2 R8.1 R10.1 | length 3.6
  Top Layer w0.254: R7.2 9.75,25.725 R10.1 R8.1
NetR9_1: R9.1 R11.2 S2.2 | length 35.5
  Top Layer w0.254: R11.2 R9.1 17.775,8.2 v1(38.2,8.2) ; v1(38.2,11.4) 38.2,13.2 40.1,15.1 S2.2@45.1,15.1
  Bottom Layer w0.254: v1(38.2,8.2) v1(38.2,11.4)
PA7_BTN2: P1.18 R13.2 U2.4 | length 6.6
  Top Layer w0.254: P1.18 10.25,12.5 10.9,11.85 U2.4 12,13.475 R13.2
PA8_POT: C7.1 P1.19 R14.1 | length 19
  Top Layer w0.254: P1.19 9.95,12 10.621,11.329 10.621,2.1 11.096,1.625 C7.1 ; C7.1@14.975,1.65 R14.1
PA9_12V_MONITOR: C2.1 P1.20 R8.2 | length 28.7
  Top Layer w0.254: P1.20 8.7,11.5 9.8,10.4 C2.1 9,9.3 8.8,9.1 8.8,8.6 8.1,7.9 6.5,7.9 6,8.4 6,21.2 6.4,21.6 9.85,21.6 11.25,23 11.25,23.019 11.325,23.094 R8.2
PB0_BTN1: P1.17 R12.2 U1.4 | length 12.4
  Top Layer w0.254: P1.17 8.2,13 14.65,19.45 U1.4 15.4,21.05 R12.2
PB3/LED_GREEN_PWM: P1.38 R1.1 | length 51.4
  Top Layer w0.254: P1.38 3.709,15.009 4.802,15.009 5.094,15.3 5.094,21.406 4.9,21.6 v1(4.9,21.7) ; v1(4.9,23.7) 4.919,23.7 8.594,27.374 8.594,43.738 9.262,44.406 25.177,44.406 26.514,45.743 R1.1
  Bottom Layer w0.254: v1(4.9,21.7) v1(4.9,23.7)
PB4/LED_YELLOW_PWM: P1.37 R4.1 | length 50.1
  Top Layer w0.254: P1.37 3.709,14.509 4.959,14.509 5.5,15.05 5.5,21.482 6.024,22.006 6.706,22.006 9,24.3 9,43.569 9.431,44 R4.1
PB8/I2C1_SCL: P1.32 P4.1 R15.2 | length 34.8
  Top Layer w0.25: v1(1.6,13.3) 1.5,13.2 1.5,12.5 2,12 P1.32 ; P4.1 3.346,39.6 R15.2 5.425,38.899 6.402,37.922 6.402,26.952 v1(3.6,24.15)
  Bottom Layer w0.25: v1(1.6,13.3) 1.476,13.424 1.645,13.593 1.645,14.071 0.902,14.814 0.902,21.452 v1(3.6,24.15)
PB9/I2C1_SDA: P1.31 P4.2 R16.2 | length 32.5
  Top Layer w0.25: v1(1.068,13.832) 1.023,13.787 1.023,12.27 1.793,11.5 P1.31 ; v1(2.7,24.1) 5.7,27.1 R16.2 P4.2
  Bottom Layer w0.25: v1(1.068,13.832) 0.5,14.4 0.5,21.7 2.633,23.833 2.633,24.033 v1(2.7,24.1)
PB12/SPI2_NSS: P1.11 P3.4 | length 22.7
  Top Layer w0.254: P1.11 7.309,16.009 8.29,16.009 14.299,22.017 14.299,32.501 P3.4
PB13/SPI2_SCK: P1.10 P3.3 | length 24.7
  Top Layer w0.254: P1.10 7.309,16.509 8.216,16.509 13.892,22.185 13.892,34.634 P3.3
PB14/SPI2_MISO: P1.9 P3.2 | length 26.7
  Top Layer w0.254: P1.9 7.309,17.009 8.141,17.009 13.486,22.354 13.486,36.768 P3.2
PB15/SPI2_MOSI: P1.8 P3.1 | length 28.7
  Top Layer w0.254: P1.8 7.309,17.509 8.066,17.509 13.079,22.522 13.079,38.901 P3.1
pads on no net: P1. P1.5 P1.6 P1.7 P1.12 P1.13 P1.14 P1.15 P1.16 P1.21 P1.22 P1.23 P1.24 P1.25 P1.30 P1.33 P1.34 P1.35 P1.36 P1.39 P1.46 P2. U1.1 U2.1

## Polygon pours and split planes (outlines as drawn)
GND on Top Layer "Top Layer-GND" (solid, pour order 2): 0,50 0,0 50,0 50,50
GND on Bottom Layer "Top Layer-GND 1" (solid, pour order 0): 0,53.29 0,0 50,0 50,53.29

## Keep-outs
Keep-Out Layer:
  lines w0.254: 0,0 0,0 ; 0,0 50,0 50,50 0,50 0,0

## Silkscreen, mask and mechanical layers (free items; w line width, h text height)
Top Overlay:
  lines w0.254: 0,0 35,0 35,30 0,30 0,0
  text "POWER" at 19,48.4 h0.5
  text "PB3 BLUE" at 26,48.4 h0.5
  text "PB4 YELLOW" at 26,42.08 h0.5
  text "MOSI" at 18.067,41.78 h0.5
  text "SCL" at 0.4,39.2 h0.5
  text "MISO" at 18.067,39.2 h0.5
  text "3V3" at 40.267,39.14 h0.5
  text "SCK" at 18.067,36.7 h0.5
  text "SDA" at 0.4,36.6 h0.5
  text "GND" at 40.267,36.6 h0.5
  text "NSS" at 18.067,34.16 h0.5
  text "GND" at 0.4,34.06 h0.5
  text "GND" at 18.067,31.62 h0.5